# Altium PCB 08.C8051_TIMER_LCD_V1.0.0.PcbDoc
Units mil, origin at the board's own origin, x right, y up, seen from the top; angles counter-clockwise.
Board outline 1287.68 x 774.96 mil, 2 copper layers (Top Layer, Bottom Layer); 46 components, 33 nets, 184 pads, 4 vias.
Unrouted connection lines stored in the file: 81.
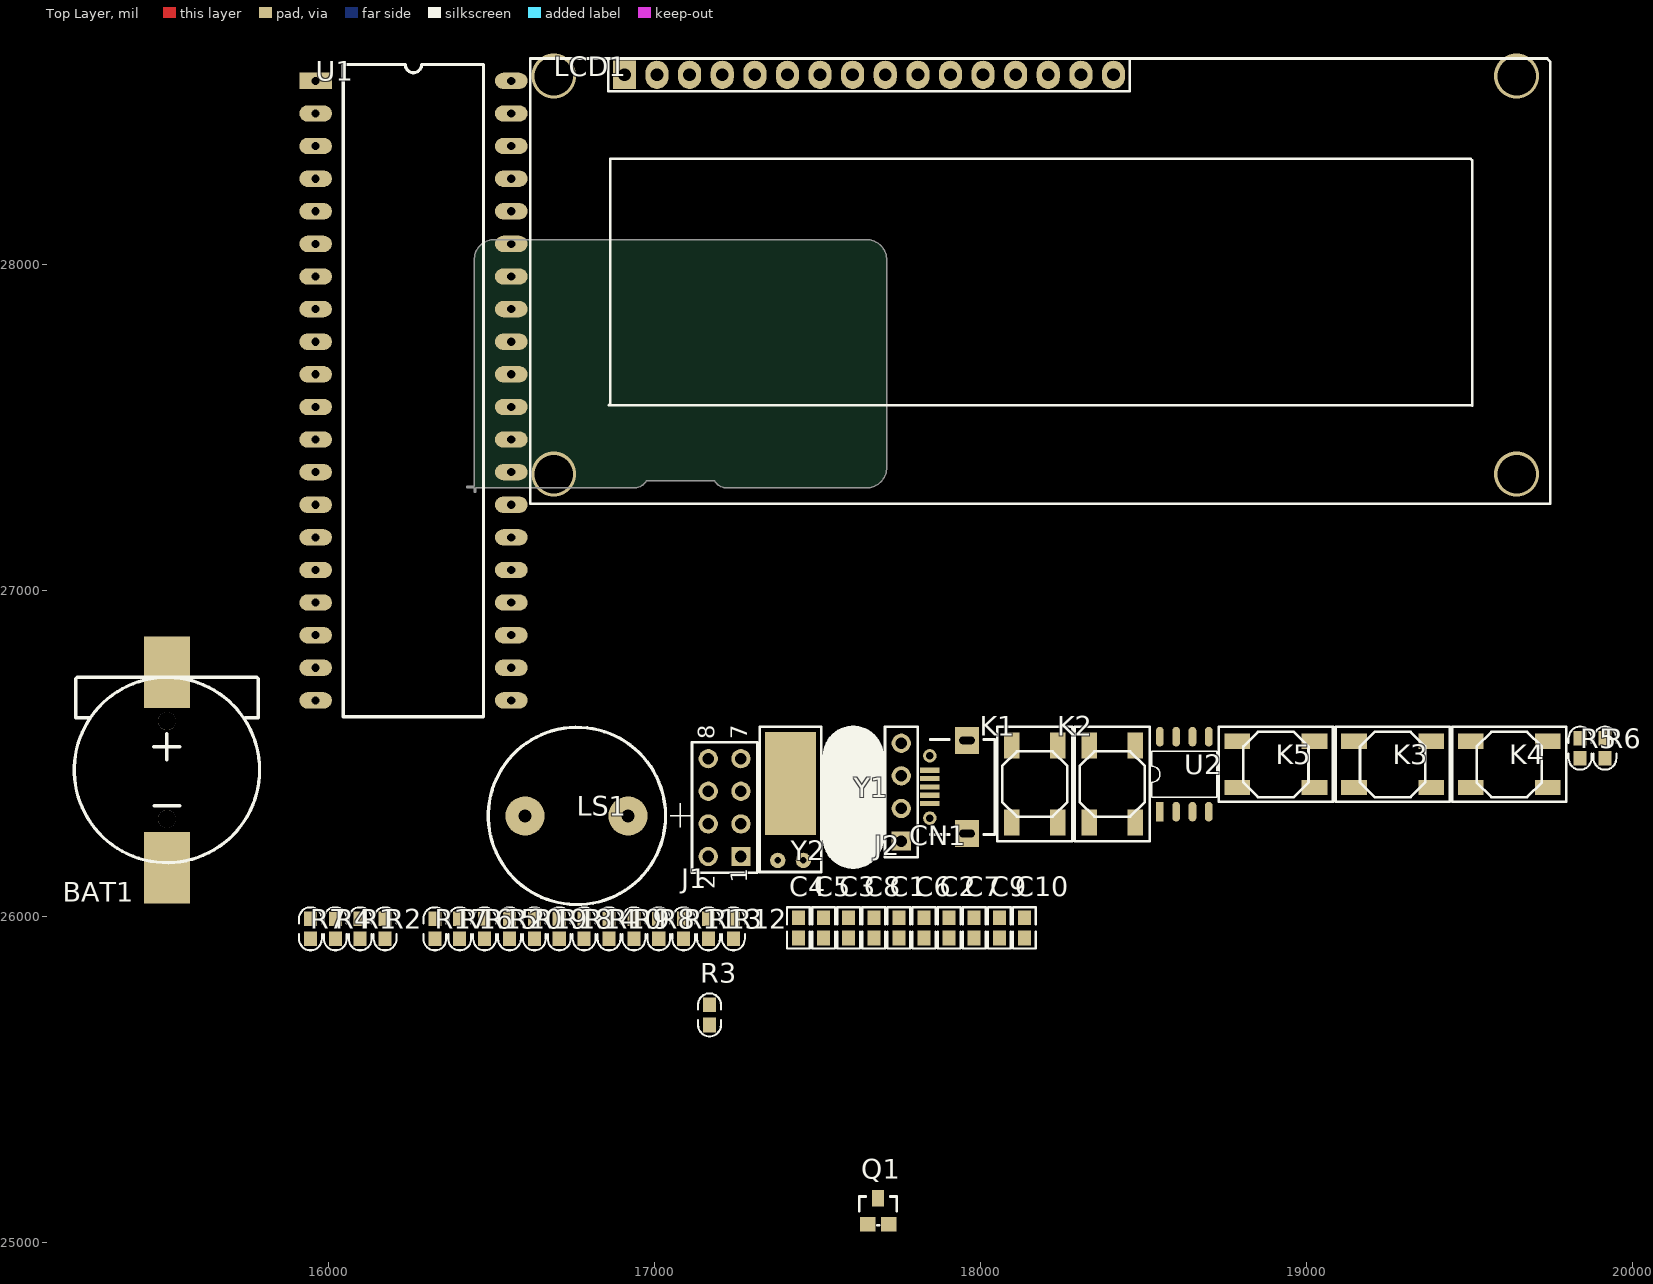
[diagram p0: Top Layer view]
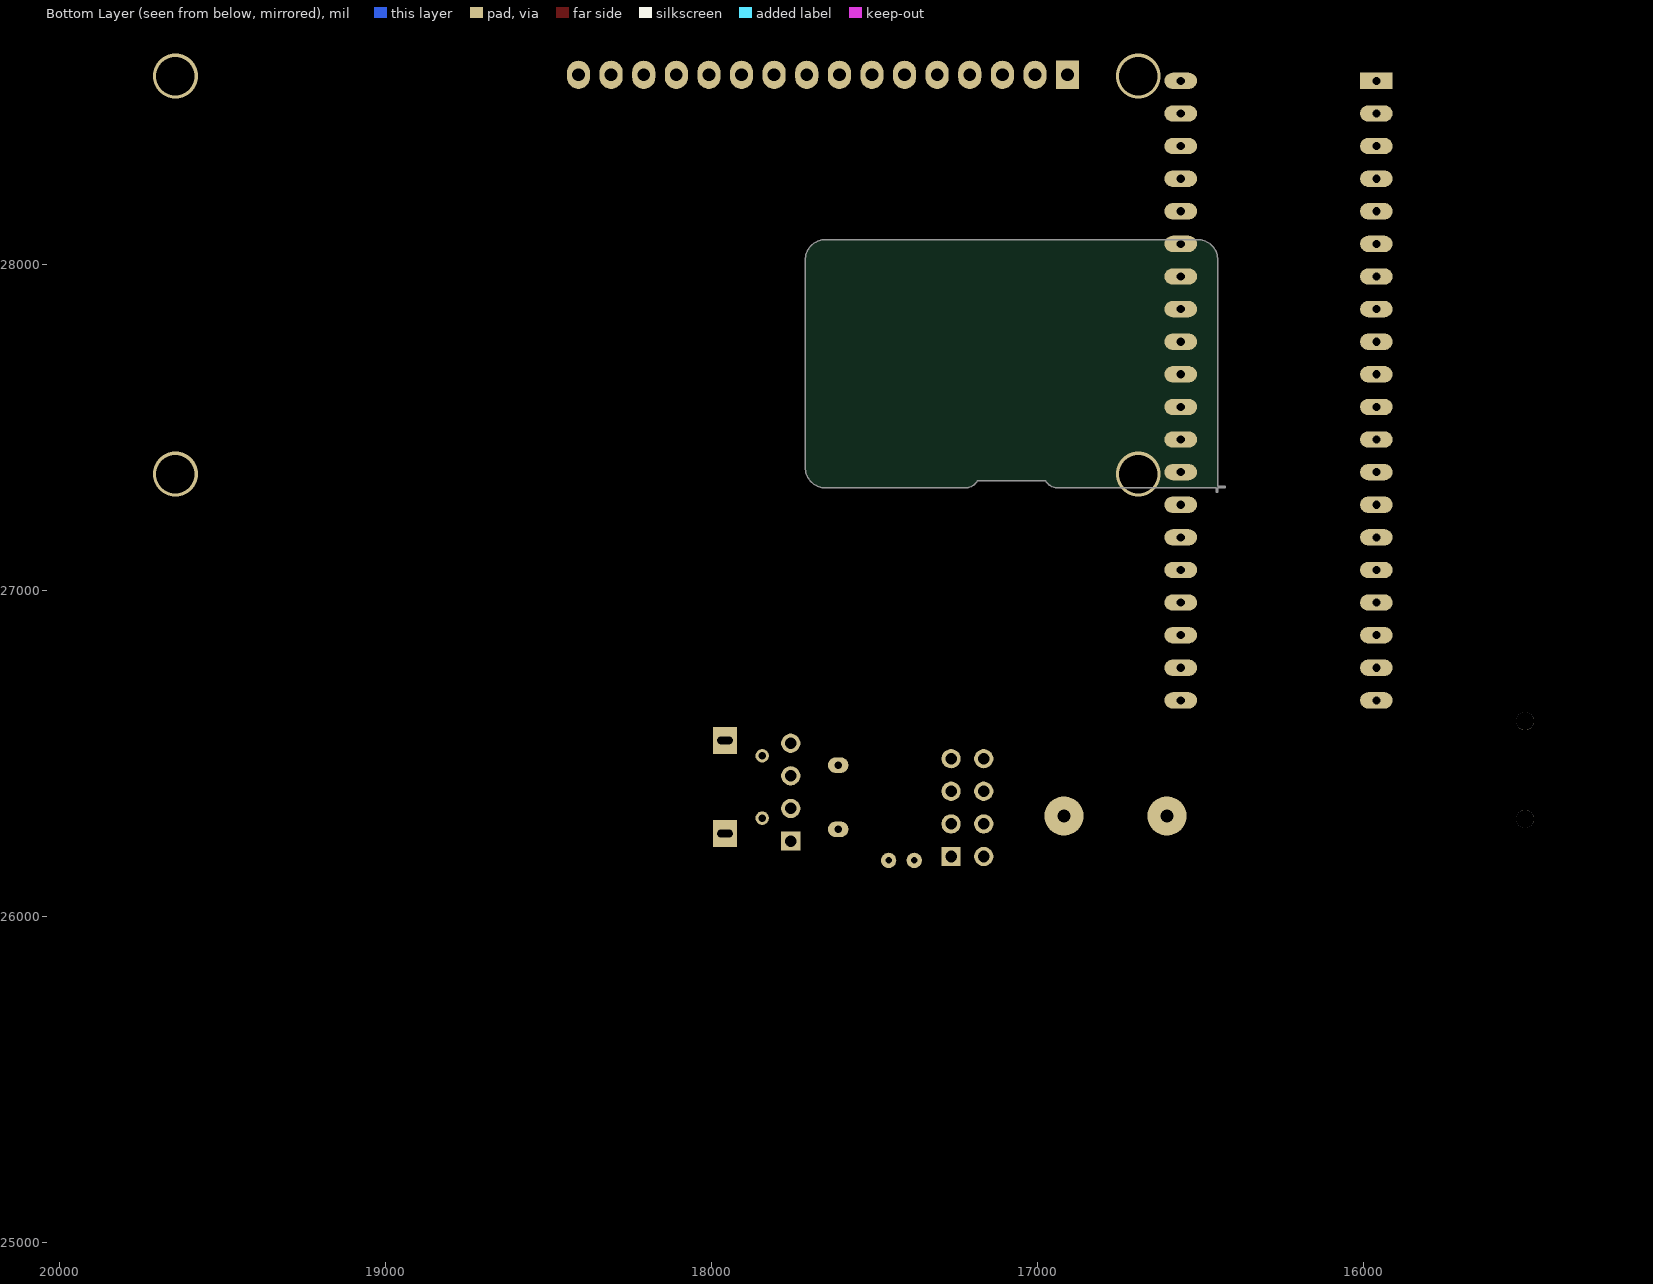
[diagram p1: Bottom Layer view, seen from below]

## Layer stack, top to bottom
Top Layer: signal copper 1.4
Dielectric: dielectric 12.6, FR-4, Dk 4.8
Bottom Layer: signal copper 1.4

## Board outline
16447.49,27302.96 16447.49,27314.49 16427.18,27314.49 cw(c16427.18,27317) 16427.18,27319.52 16447.49,27319.52 16447.49,28013.85 16447.48,28013.85 ccw(c16450,28013.85) 16447.49,28013.83 16447.48,28013.85 cw(c16509.06,28013.85) 16509.06,28075.42 17650.79,28075.42 cw(c17650.79,28013.85) 17712.36,28013.85 17712.36,27376.06 cw(c17650.79,27376.06) 17650.79,27314.49 17220.97,27314.49 cw(c17220.97,27356.37) 17184.74,27335.35 16975.1,27335.35 cw(c16938.87,27356.37) 16938.87,27314.49 16452.51,27314.49 16452.51,27302.96 cw(c16450,27302.96)

## Design rules (kind name [scope] priority, off if disabled: settings)
Clearance Clearance_3 [(InNetClass('BLE_ANT'))] p1: gap=4
Clearance Clearance_2 [InComponent('U3')] p2: gap=5
Clearance Clearance_1 [InNamedPolygon('PCB top') Or  InNamedPolygon('PCB bottom')] p3: gap=12
Clearance [All] p4: gap=6
ComponentClearance [All] p1 off: gap=10 collisioncheckmode=3 verticalgap=10 showdistances=FALSE
DiffPairsRouting DiffPair_USBDiffPairsRouting [InDifferentialPair ('USB')] p1: maxlimit=7.87 minlimit=7.87 mostfreqgap=7.87 maxuncoupledlength=500
DiffPairsRouting [All] p2: maxlimit=10 minlimit=10 mostfreqgap=10 maxuncoupledlength=500
FabricationTestPointUsage TestPointUsage [All] p1: valid=0 allowmultiple=FALSE
FabricationTestpoint Testpoint [(IsPad And (OnTopLayer Or OnBottomLayer))] p1: side=3 testpointundercomponent=TRUE minsize=40 maxsize=100 preferedsize=60 minholesize=0 maxholesize=40 preferedholesize=32 testpointgrid=1 allowsidetop=TRUE allowsidebottom=TRUE usegrid=TRUE gridtolerance=0.01
MatchedLengths DiffPair_USBMatchedLengths [InDifferentialPair ('USB')] p1: tolerance=1000 checknetsindiffpair=TRUE checkdiffpairvsdiffpair=FALSE checkothers=FALSE
PolygonConnect via [Isvia vs IsNamedPolygon('PCB top') Or  IsNamedPolygon('PCB bottom')] p1: connectstyle=Direct reliefconductorwidth=10 reliefentries=4 polygonreliefangle="90 Angle"
PolygonConnect wire [All vs IsNamedPolygon('PCB top') Or  IsNamedPolygon('PCB bottom')] p2: connectstyle=Relief reliefconductorwidth=25 reliefentries=4 polygonreliefangle="90 Angle"
PolygonConnect [All] p3: connectstyle=Relief reliefconductorwidth=10 reliefentries=4 polygonreliefangle="90 Angle"
RoutingVias [All] p1: holewidth=14 width=24 viastyle="Through Hole" minholewidth=10 minwidth=20 maxholewidth=50 maxwidth=100
SilkscreenOverComponentPads [All] p1: minsilkscreentomaskgap=10
SolderMaskExpansion [All] p1: expansion=4
Width [All] p1: maxlimit=50 minlimit=7.87 preferedwidth=10
23 further rules are at their usual default settings.

## Components (designator, comment, footprint, x,y, rotation, side; value= is the part's Value field where it differs from the comment)
BAT1 "CR1220" BATTERY-CELL 15505,26449 r90 top
C1 "4.7uF" C0603 17749.76,25964.76 r0 top
C2 "0.1uF" C0603 17903.76,25964.76 r0 top
C3 "20pF" C0603 17595.76,25964.76 r0 top
C4 "20pF" C0603 17441.76,25964.76 r0 top
C5 "4.7uF" C0603 17518.76,25964.76 r0 top
C6 "0.1uF" C0603 17826.76,25964.76 r0 top
C7 "0.1uF" C0603 17980.76,25964.76 r0 top
C8 "0.1uF" C0603 17672.76,25964.76 r0 top
C9 "10pF" C0603 18057.76,25964.76 r0 top
C10 "10pF" C0603 18134.76,25964.76 r0 top
CN1 "Micro USB" MICRO_USB_9 17844.58,26396.98 r90 top
J1 "Header 4X2H" HDR2X4 17265.22,26183.72 r90 top
J2 "CON4" HDR1X4 17757.11,26231.1 r90 top
K1 "SW-PB-1" SWITCH_1#1 18166.33,26406.1 r0 top
K2 "SW-PB-1" SWITCH_1#1 18404.21,26406.1 r0 top
K3 "SW-PB-1" SWITCH_1#2 19263.89,26466.1 r0 top
K4 "SW-PB-1" SWITCH_1#2 19621.76,26466.1 r0 top
K5 "SW-PB-1" SWITCH_1#2 18906.02,26466.1 r0 top
LCD1 "LCD1602" LCD1602 16691.4,28577.1 r0 top
LS1 "Bell" BUZZER 16761.28,26308.15 r0 top
Q1 "SI2302" SOT_23(N) 17686,25136 r0 top
R1 "4.7K" R0603 16097.75,25962.11 r0 top
R2 "4.7K" R0603 16174.05,25962.11 r0 top
R3 "10K" R0603 17169,25698 r180 top
R4 "10K" R0603 16021.45,25962.11 r0 top
R5 "10K" R0603 19838.85,26515.89 r0 top
R6 "10K" R0603 19915.15,26515.89 r0 top
R7 "10K" R0603 15945.15,25962.11 r0 top
R8 "10K" R0603 17013.34,25962.11 r0 top
R9 "10K" R0603 16937.04,25962.11 r0 top
R10 "10K" R0603 16860.74,25962.11 r0 top
R11 "10K" R0603 17089.63,25962.11 r0 top
R12 "10K" R0603 17242.23,25962.11 r0 top
R13 "10K" R0603 17165.93,25962.11 r0 top
R14 "10K" R0603 16784.44,25962.11 r0 top
R15 "10K" R0603 16479.24,25962.11 r0 top
R16 "10K" R0603 16402.94,25962.11 r0 top
R17 "10K" R0603 16326.64,25962.11 r0 top
R18 "10K" R0603 16708.14,25962.11 r0 top
R19 "10K" R0603 16631.84,25962.11 r0 top
R20 "10K" R0603 16555.54,25962.11 r0 top
U1 "AT89C52" DIP40 15961,28562.52 r0 top
U2 "DS1302ZN" SOP-8 18625.11,26436.04 r0 top
Y1 "12M" XTAL 17611.56,26365.47 r0 top
Y2 "32.768K" XTAL_32.768KHz 17417.58,26171.65 r0 top

## Footprints (in the part's own frame and the unit in brackets; to place one, negate y for a bottom-side part, rotate by r counter-clockwise, add the part's x,y. Pads: shape width x height; smd on the part's side, far side on the other; paste and mask are expansions set on the pad)
BATTERY-CELL [mil] "BAT1"
  rect 220x140 smd: 1(300,0) 2(-300,0)
  round 55 hole 55: " "(-150,0) " "(150,0)
  silkscreen extent -284,-284 284,284, body extent -235,-235 237,237, height 98
BUZZER [mil]
  round 120 hole 40: 1(158,0) 2(-158,0)
  silkscreen extent -271,-272 348,272, body extent -260,-270 280,269, height 299
C0603 [mil] "SMT电容"
  rect 40x45 smd: 1(0,31) 2(0,-31)
  silkscreen extent -35,-63 35,63, body extent -18,-32 18,31, height 31
DIP40 [mil]
  rect 100x50 hole 25: 1(0,0)
  oval 100x50 hole 25: 2(0,-100) 3(0,-200) 4(0,-300) 5(0,-400) 6(0,-500) 7(0,-600) 8(0,-700) 9(0,-800) 10(0,-900) 11(0,-1000) 12(0,-1100) 13(0,-1200) 14(0,-1300) 15(0,-1400) 16(0,-1500) 17(0,-1600) 18(0,-1700) 19(0,-1800) 20(0,-1900) 21(600,-1900) 22(600,-1800) 23(600,-1700) 24(600,-1600) 25(600,-1500) 26(600,-1400) 27(600,-1300) 28(600,-1200) 29(600,-1100) 30(600,-1000) 31(600,-900) 32(600,-800) 33(600,-700) 34(600,-600) 35(600,-500) 36(600,-400) 37(600,-300) 38(600,-200) 39(600,-100) 40(600,0)
  silkscreen extent 85,-1950 515,50, body extent 0,-1977 610,87, height 224
HDR1X4 [mm] "Connector; Header; 4 Position"
  rect 1.5x1.5 hole 0.9: 1(0,0)
  round 1.5 hole 0.9: 2(2.54,0) 3(5.08,0) 4(7.62,0)
  silkscreen extent -1.27,-1.27 8.89,1.27
HDR2X4 [mm] "Connector; Header; 4x2 Position"
  rect 1.5x1.5 hole 0.9: 1(0,0)
  round 1.5 hole 0.9: 2(0,2.54) 3(2.54,0) 4(2.54,2.54) 5(5.08,0) 6(5.08,2.54) 7(7.62,0) 8(7.62,2.54)
  silkscreen extent -1.27,-1.27 8.89,3.81
LCD1602 [mm]
  rect 1.8x2.2 hole 1: 1(5.5,0.1)
  oval 1.8x2.2 hole 1: 2(8.04,0.1) 3(10.58,0.1) 4(13.12,0.1) 5(15.66,0.1) 6(18.2,0.1) 7(20.74,0.1) 8(23.28,0.1) 9(25.82,0.1) 10(28.36,0.1) 11(30.9,0.1) 12(33.44,0.1) 13(35.98,0.1) 14(38.52,0.1) 15(41.06,0.1) 16(43.6,0.1)
  silkscreen extent -1.84,-33.33 77.64,1.37
MICRO_USB_9 [mm]
  rect 0.4x1.5 smd: 1(-1.3,0) 2(-0.65,0) 3(0,0) 4(0.65,0) 5(1.3,0)
  round 1.05 hole 0.6: 6(-2.425,0) 7(2.425,0)
  rect 2.1x1.9 hole 0.6 slot 1.2 at 90 deg: 8(-3.625,-2.9) 9(3.625,-2.9)
  silkscreen extent -3.7,-5.05 3.7,-0.05
R0603 [mil] "SMT电阻"
  rect 40x45 smd: 1(0,31) 2(0,-31)
  silkscreen extent -35,-66 35,66, body extent -15,-31 16,31, height 20
SOP-8 [mil]
  rect 23.62x60 smd: 1(-75,-115)
  oval 23.62x60 smd: 2(-25,-115) 3(25,-115) 4(75,-115) 5(75,115) 6(25,115) 7(-25,115) 8(-75,115)
  silkscreen extent -100,-70 100,70, body extent -100,-119 98,119, height 63
SOT_23(N) [mm]
  rect 1.2x1.1 smd: 1(-0.815,-2.032) 2(0.825,-2.032)
  rect 0.914x1.27 smd: 3(0,0)
  silkscreen extent -1.47,-2.1 1.45,0.13, body extent -1.5,-2.52 1.5,0.48, height 1.3
SWITCH_1#1 [mm]
  round 1.5 on Top Overlay: 0(0,0)
  rect 1.2x2 smd: 1(-1.8,-3) 2(-1.8,3) 3(1.8,-3) 4(1.8,3)
  silkscreen extent -2.92,-4.44 2.92,4.44, body extent -2.6,-3.19 2.6,3.11, height 1.5
SWITCH_1#2 [mm]
  round 1.5 on Top Overlay: 0(0,0)
  rect 2x1.2 smd: 1(-3,1.8) 2(3,1.8) 3(-3,-1.8) 4(3,-1.8)
  silkscreen extent -4.44,-2.92 4.44,2.92, body extent -3.19,-2.6 3.11,2.6, height 1.5
XTAL [mm] "10*4.5----5"
  oval 1.6x1.2 hole 0.6: 1(0,2.5) 2(0,-2.5)
  silkscreen extent -2.3,-5.46 2.2,5.46, body extent -2.3,-5.5 2.17,5.47, height 2.35
XTAL_32.768KHz [mm]
  round 1.2 hole 0.5: 1(-1,0) 2(1,0)
  rect 4x8 smd: 3(0,6)
  silkscreen extent -2.4,-0.9 2.4,10.4, body extent -1.15,-0.15 1.15,8.2, height 1.95

## Part data
BAT1: library part BATTERY
C1 C3 C4 C5 C9 C10: library part CAP, "SMT电容"
C2 C6 C7 C8: library part 电容, "SMT电容"
CN1: library part Mini_USB_3, "Micro USBͷ"
J1: "Header, 4-Pin, Dual row, Right Angle"
J2: "Connector"
K1 K2 K3 K4 K5: "轻触按键"
LS1: "Electrical Bell"
Q1: library part NMOS-2, "N-Channel Power MOSFET"
R1 R2 R3 R4 R5 R6 R7 R8 R9 R10 R11 R12 R13 R14 R15 R16 R17 R18 R19 R20: library part RES1, "SMT电阻"
U1: "8-Bit Microcontroller with 8K Flash ROM"
U2: library part DS1302
Y1 Y2: library part XTAL, "Crystal Oscillator"

## Via types
v1: diameter 137.8, hole 118.11, Top Layer to Bottom Layer, 4 vias

## Nets (pads, with @x,y where several pads share a name; then routed paths per layer and width w, separated by ;. In a path a pad name is that pad's centre, name@x,y a point inside that pad or via, vN(x,y) a via of type N, cw(c..) or ccw(c..) an arc to the next point about the centre after c; other vN are vias at no path point)
BEEP_CON: Q1.1 R12.2 U1.27
DS_CE: R13.1 U1.24 U2.7
DS_CLK: R15.1 U1.26 U2.5
DS_DIO: R14.1 U1.25 U2.6
GND: BAT1.2 C1.1 C2.2 C3.2 C4.2 C5.1 C6.2 C7.1 C9.2 C10.2 CN1.4 CN1.5 CN1.6 CN1.7 CN1.8 CN1.9 J1.2 J1.4 J1.6 J1.8 J2.2 K2.1 K3.2 K4.2 K5.1 LCD1.1 LCD1.16 Q1.2 R12.1 R20.1 U1.20 U2.4
KEY1: K2.2 R16.1 U1.1
KEY2: K3.1 R17.1 U1.2
KEY3: K4.1 R18.1 U1.3
KEY4: K5.2 R19.1 U1.4
NetC9_1: C9.1 U2.2 Y2.2
NetC10_1: C10.1 U2.3 Y2.1
NetLCD1_3: LCD1.3 R1.1
NetLCD1_4: LCD1.4 U1.21
NetLCD1_5: LCD1.5 U1.22
NetLCD1_6: LCD1.6 U1.23
NetLCD1_7: LCD1.7 R4.1 U1.39
NetLCD1_8: LCD1.8 R5.1 U1.38
NetLCD1_9: LCD1.9 R6.1 U1.37
NetLCD1_10: LCD1.10 R7.1 U1.36
NetLCD1_11: LCD1.11 R8.1 U1.35
NetLCD1_12: LCD1.12 R9.1 U1.34
NetLCD1_13: LCD1.13 R10.1 U1.33
NetLCD1_14: LCD1.14 R11.1 U1.32
NetLCD1_15: LCD1.15 R2.1
NetLS1_2: LS1.2 R3.2
NetQ1_3: Q1.3 R3.1
RST: C8.2 K1.1 R20.2 U1.9
RXD: J2.4 U1.10
TXD: J2.3 U1.11
V_5V: C1.2 C2.1 C6.1 C7.2 C8.1 CN1.1 J1.1 J1.3 J1.5 J1.7 J2.1 K1.2 LCD1.2 LS1.1 R1.2 R2.2 R4.2 R5.2 R6.2 R7.2 R8.2 R9.2 R10.2 R11.2 R13.2 R14.2 R15.2 R16.2 R17.2 R18.2 R19.2 U1.31 U1.40 U2.1
V_BAT: BAT1.1 C5.2 U2.8
XTAL1: C3.1 U1.19 Y1.2
XTAL2: C4.1 U1.18 Y1.1
pads on no net: "BAT1. " CN1.2 CN1.3 K1.0 K1.3 K1.4 K2.0 K2.3 K2.4 K3.0 K3.3 K3.4 K4.0 K4.3 K4.4 K5.0 K5.3 K5.4 U1.5 U1.6 U1.7 U1.8 U1.12 U1.13 U1.14 U1.15 U1.16 U1.17 U1.28 U1.29 U1.30 Y2.3
copper on no net:
  other v1: 16691.4,27356.63 19644.16,27356.63 16691.4,28577.1 19644.16,28577.1

## Text inside footprints (layer, text, board x,y; h text height)
BAT1: Mechanical 11 "1" at 15515,26749 h25 r90; Mechanical 11 "2" at 15515,26149 h25 r90
J1: Top Overlay "2" at 17185.22,26083.72 h50 r90; Top Overlay "1" at 17285.22,26103.72 h50 r90; Top Overlay "7" at 17285.22,26543.72 h50 r90; Top Overlay "8" at 17185.22,26543.72 h50 r90